# Altium PCB Light Board.PcbDoc
Units mm, origin at the board's own origin, x right, y up, seen from the top; angles counter-clockwise.
Board outline 45 x 18 mm, 2 copper layers (Top Layer, Bottom Layer); 20 components, 16 nets, 120 pads, 0 vias.
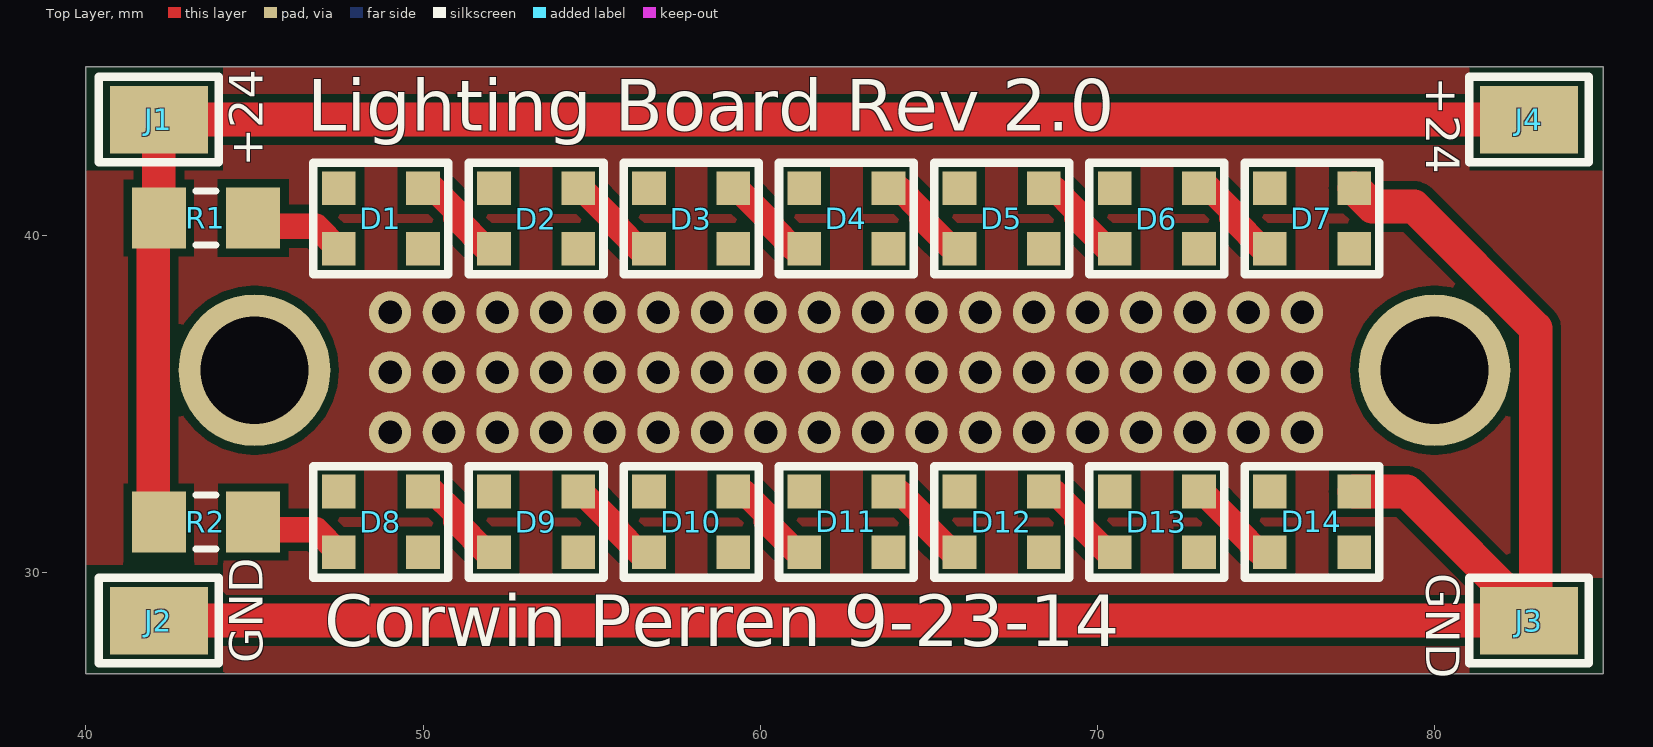
[diagram p0: Top Layer view]
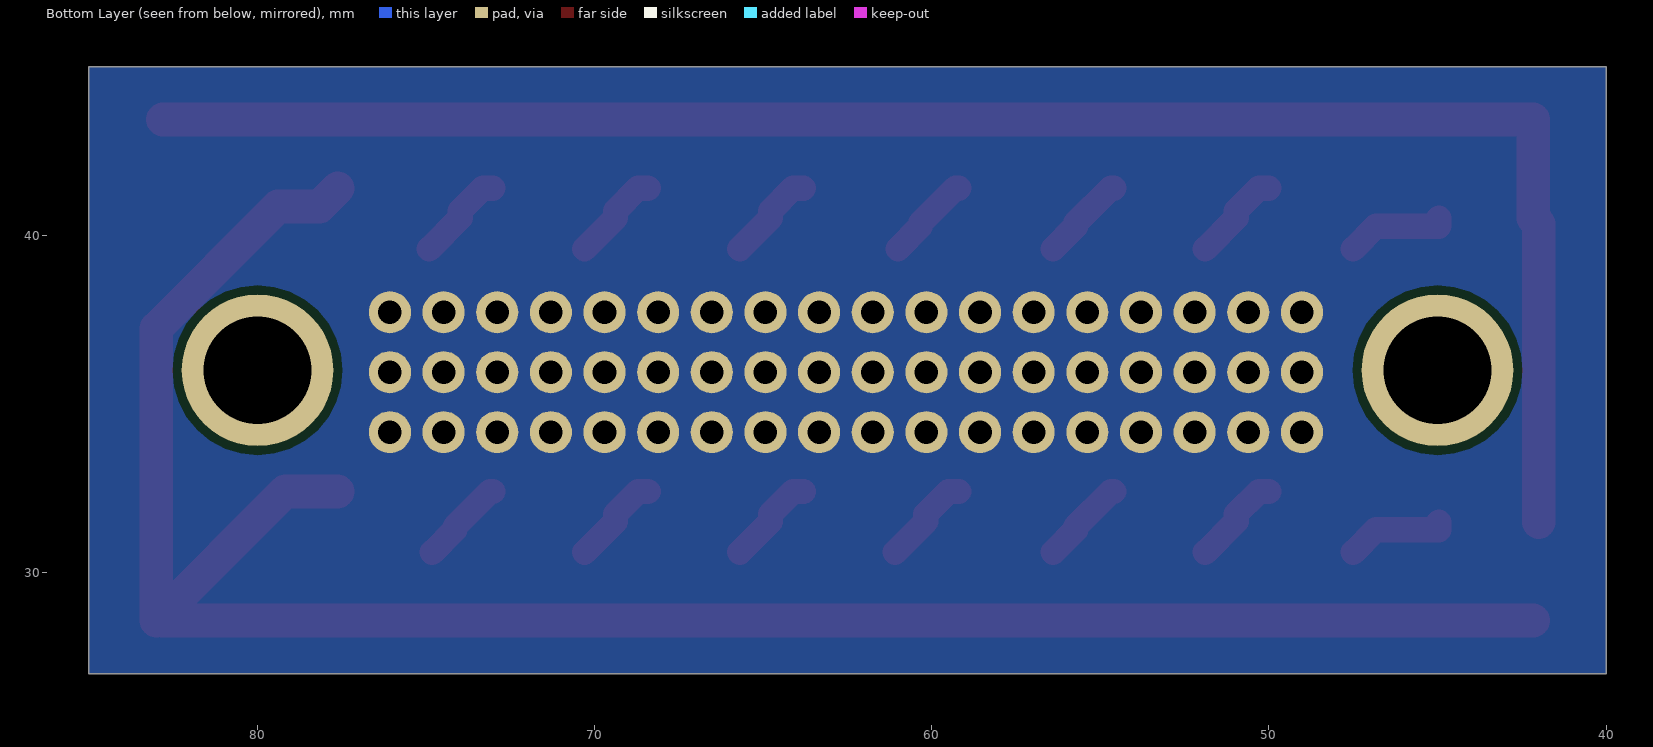
[diagram p1: Bottom Layer view, seen from below]

## Layer stack, top to bottom
Top Solder: solder mask 0.0102, Solder Resist, Dk 3.5
Top Layer: signal copper 0.0356
Dielectric 1: dielectric 0.32, FR-4, Dk 4.8
Bottom Layer: signal copper 0.0356
Bottom Solder: solder mask 0.0102, Solder Resist, Dk 3.5

## Board outline
40,27 85,27 85,45 40,45

## Design rules (kind name [scope] priority, off if disabled: settings)
Clearance [All] p1: gap=0.254
PolygonConnect [All] p1: connectstyle=Relief reliefconductorwidth=0.254 reliefentries=4 polygonreliefangle="90 Angle" airgapwidth=0.254
RoutingVias [All] p1: holewidth=0.711 width=1.27 viastyle="Through Hole" minholewidth=0.711 minwidth=1.27 maxholewidth=0.711 maxwidth=1.27
SolderMaskExpansion [All] p1: expansion=0.102
UnpouredPolygon [All] p1: allowunpoured=FALSE
Width [All] p1: maxlimit=1 minlimit=0.75 preferedwidth=1 minimp=50.000000 maximp=50.000000 favimp=50.000000
29 further rules are at their usual default settings.

## Components (designator, comment, footprint, x,y, rotation, side; value= is the part's Value field where it differs from the comment)
D1 "CLA1B-WKW-XD0F0E13 White SMD Led" "CLA1B-WKW-XD0F0E13 White SMD Led" 48.748,40.5 r0 top
D2 "CLA1B-WKW-XD0F0E13 White SMD Led" "CLA1B-WKW-XD0F0E13 White SMD Led" 53.352,40.5 r0 top
D3 "CLA1B-WKW-XD0F0E13 White SMD Led" "CLA1B-WKW-XD0F0E13 White SMD Led" 57.955,40.5 r0 top
D4 "CLA1B-WKW-XD0F0E13 White SMD Led" "CLA1B-WKW-XD0F0E13 White SMD Led" 62.558,40.5 r0 top
D5 "CLA1B-WKW-XD0F0E13 White SMD Led" "CLA1B-WKW-XD0F0E13 White SMD Led" 67.161,40.5 r0 top
D6 "CLA1B-WKW-XD0F0E13 White SMD Led" "CLA1B-WKW-XD0F0E13 White SMD Led" 71.764,40.5 r0 top
D7 "CLA1B-WKW-XD0F0E13 White SMD Led" "CLA1B-WKW-XD0F0E13 White SMD Led" 76.367,40.5 r0 top
D8 "CLA1B-WKW-XD0F0E13 White SMD Led" "CLA1B-WKW-XD0F0E13 White SMD Led" 48.748,31.5 r0 top
D9 "CLA1B-WKW-XD0F0E13 White SMD Led" "CLA1B-WKW-XD0F0E13 White SMD Led" 53.352,31.5 r0 top
D10 "CLA1B-WKW-XD0F0E13 White SMD Led" "CLA1B-WKW-XD0F0E13 White SMD Led" 57.955,31.5 r0 top
D11 "CLA1B-WKW-XD0F0E13 White SMD Led" "CLA1B-WKW-XD0F0E13 White SMD Led" 62.558,31.5 r0 top
D12 "CLA1B-WKW-XD0F0E13 White SMD Led" "CLA1B-WKW-XD0F0E13 White SMD Led" 67.161,31.5 r0 top
D13 "CLA1B-WKW-XD0F0E13 White SMD Led" "CLA1B-WKW-XD0F0E13 White SMD Led" 71.764,31.5 r0 top
D14 "CLA1B-WKW-XD0F0E13 White SMD Led" "CLA1B-WKW-XD0F0E13 White SMD Led" 76.367,31.5 r0 top
J1 "CONTACT IDC 1 POS SMD 22AWG" "CONTACT IDC 1 POS SMD 22AWG" 42.164,43.434 r0 top
J2 "CONTACT IDC 1 POS SMD 22AWG" "CONTACT IDC 1 POS SMD 22AWG" 42.164,28.575 r0 top
J3 "CONTACT IDC 1 POS SMD 22AWG" "CONTACT IDC 1 POS SMD 22AWG" 82.804,28.575 r0 top
J4 "CONTACT IDC 1 POS SMD 22AWG" "CONTACT IDC 1 POS SMD 22AWG" 82.804,43.434 r0 top
R1 "Res1" 8-1206 43.561,40.513 r180 top
R2 "Res1" 8-1206 43.561,31.5 r180 top

## Footprints (in the part's own frame and the unit in brackets; to place one, negate y for a bottom-side part, rotate by r counter-clockwise, add the part's x,y. Pads: shape width x height; smd on the part's side, far side on the other; paste and mask are expansions set on the pad)
8-1206 [mm] "Chip Resistor; Body 3.1 x 1.6 mm (LxW typ)"
  rect 1.6x1.8 smd: 1(-1.4,0) 2(1.4,0)
  silkscreen extent -0.3,-0.8 0.3,0.8
"CLA1B-WKW-XD0F0E13 White SMD Led" [mm]
  rect 1x1 smd: 1(-1.25,0.9) 2(-1.25,-0.9) 3(1.25,-0.9) 4(1.25,0.9)
  silkscreen extent -2,-1.65 2,1.65
"CONTACT IDC 1 POS SMD 22AWG" [mm]
  rect 2.9x2 smd: 1(0,0)
  silkscreen extent -1.78,-1.27 1.78,1.27

## Part data
R1 R2: "Resistor"

## Free pads (board coordinates)
  round 4.5 hole 3.2: 0(45,36) 1(80,36)
  round 1.25 hole 0.7: 1(49.022,34.163) 1(49.022,35.941) 1(49.022,37.719) 1(50.613,34.163) 1(50.613,35.941) 1(50.613,37.719) 1(52.204,34.163) 1(52.204,35.941) 1(52.204,37.719) 1(53.796,34.163) 1(53.796,35.941) 1(53.796,37.719) 1(55.387,34.163) 1(55.387,35.941) 1(55.387,37.719) 1(56.978,34.163) 1(56.978,35.941) 1(56.978,37.719) 1(58.569,34.163) 1(58.569,35.941) 1(58.569,37.719) 1(60.161,34.163) 1(60.161,35.941) 1(60.161,37.719) 1(61.752,34.163) 1(61.752,35.941) 1(61.752,37.719) 1(63.343,34.163) 1(63.343,35.941) 1(63.343,37.719) 1(64.934,34.163) 1(64.934,35.941) 1(64.934,37.719) 1(66.526,34.163) 1(66.526,35.941) 1(66.526,37.719) 1(68.117,34.163) 1(68.117,35.941) 1(68.117,37.719) 1(69.708,34.163) 1(69.708,35.941) 1(69.708,37.719) 1(71.299,34.163) 1(71.299,35.941) 1(71.299,37.719) 1(72.891,34.163) 1(72.891,35.941) 1(72.891,37.719) 1(74.482,34.163) 1(74.482,35.941) 1(74.482,37.719) 1(76.073,34.163) 1(76.073,35.941) 1(76.073,37.719)

## Nets (pads, with @x,y where several pads share a name; then routed paths per layer and width w, separated by ;. In a path a pad name is that pad's centre, name@x,y a point inside that pad or via, vN(x,y) a via of type N, cw(c..) or ccw(c..) an arc to the next point about the centre after c; other vN are vias at no path point)
GND: D7.4 D14.4 J2.1 J3.1 | length 63.4
  Top Layer w1: J2.1 J3.1 ; D14.4 79.179,32.4 83.004,28.575 83.004,37.244 79.394,40.854 78.163,40.854 D7.4
NetD1_2: D1.2 R1.1 | length 3.1
  Top Layer w0.75: R1.1 44.961,40.271 46.827,40.271 D1.2
NetD1_4: D1.4 D2.2 | length 2.8
  Top Layer w0.75: D1.4 50.302,41.4 50.973,40.729 50.973,40.515 D2.2@51.888,39.6
NetD2_4: D2.4 D3.2 | length 2.6
  Top Layer w0.75: D2.4 54.691,41.4 55.731,40.361 55.731,40.271 D3.2@56.402,39.6
NetD3_4: D3.4 D4.2 | length 2.6
  Top Layer w0.75: D3.4 59.294,41.4 60.334,40.361 60.334,40.271 D4.2@61.005,39.6
NetD4_4: D4.4 D5.2 | length 2.8
  Top Layer w0.75: D4.4 64.111,41.4 64.782,40.729 64.782,40.515 D5.2@65.697,39.6
NetD5_4: D5.4 D6.2 | length 2.8
  Top Layer w0.75: D5.4 68.714,41.4 69.385,40.729 69.385,40.515 D6.2@70.3,39.6
NetD6_4: D6.4 D7.2 | length 2.8
  Top Layer w0.75: D6.4 73.317,41.4 73.988,40.729 73.988,40.515 D7.2@74.903,39.6
NetD8_2: D8.2 R2.1 | length 3
  Top Layer w0.75: R2.1 44.961,31.271 46.827,31.271 D8.2
NetD8_4: D8.4 D9.2 | length 2.8
  Top Layer w0.75: D8.4 50.302,32.4 50.973,31.729 50.973,31.515 D9.2@51.888,30.6
NetD9_4: D9.4 D10.2 | length 2.6
  Top Layer w0.75: D9.4 54.691,32.4 55.731,31.361 55.731,31.271 D10.2@56.402,30.6
NetD10_4: D10.4 D11.2 | length 2.8
  Top Layer w0.75: D10.4 59.508,32.4 60.179,31.729 60.179,31.515 D11.2@61.094,30.6
NetD11_4: D11.4 D12.2 | length 2.8
  Top Layer w0.75: D11.4 64.111,32.4 64.782,31.729 64.782,31.515 D12.2@65.697,30.6
NetD12_4: D12.4 D13.2 | length 2.8
  Top Layer w0.75: D12.4 68.714,32.4 69.385,31.729 69.385,31.515 D13.2@70.3,30.6
NetD13_4: D13.4 D14.2 | length 2.6
  Top Layer w0.75: D13.4 73.103,32.4 74.143,31.361 74.143,31.271 D14.2@74.814,30.6
VCC: J1.1 J4.1 R1.2 R2.2 | length 52.6
  Top Layer w1: R2.2@41.996,31.5 41.996,40.348 R1.2 42.164,40.516 J1.1 J4.1
pads on no net: D1.1 D1.3 D2.1 D2.3 D3.1 D3.3 D4.1 D4.3 D5.1 D5.3 D6.1 D6.3 D7.1 D7.3 D8.1 D8.3 D9.1 D9.3 D10.1 D10.3 D11.1 D11.3 D12.1 D12.3 D13.1 D13.3 D14.1 D14.3

## Polygon pours and split planes (outlines as drawn)
no net on Bottom Layer "Bottom Layer-No Net" (solid, pour order 2): 40,45 40,27 85,27 85,45 40,45
no net on Top Layer "Bottom Layer-No Net" (solid, pour order 4): 40,45 85,45 85,27 40,27

## Other copper
Top Layer:
  pour cut-out: 81.026,29.845 85.09,29.845 85.09,26.67 81.026,26.67
  pour cut-out: 81.026,45.085 85.09,45.085 85.09,41.91 81.026,41.91
  pour cut-out: 40.005,30.226 44.069,30.226 44.069,27.051 40.005,27.051
  pour cut-out: 40.005,45.085 44.069,45.085 44.069,41.91 40.005,41.91

## Silkscreen, mask and mechanical layers (free items; w line width, h text height)
Top Overlay:
  text "+24" at 79.75,44.703 h1 r270
  text "Lighting Board Rev 2.0" at 46.561,43.1 h1.52
  text "+24" at 45.25,42.037 h1 r90
  text "GND" at 79.75,29.972 h1 r270
  text "Corwin Perren 9-23-14" at 47.069,27.813 h1.52
  text "GND" at 45.25,27.306 h1 r90